# Altium PCB SWS_RIGHT.PcbDoc
Units mm, origin at the board's own origin, x right, y up, seen from the top; angles counter-clockwise.
Board outline 46.26 x 38.25 mm, 2 copper layers (Top Layer, Bottom Layer), stack 1.17 mm thick; 15 components, 20 nets, 80 pads, 90 vias.
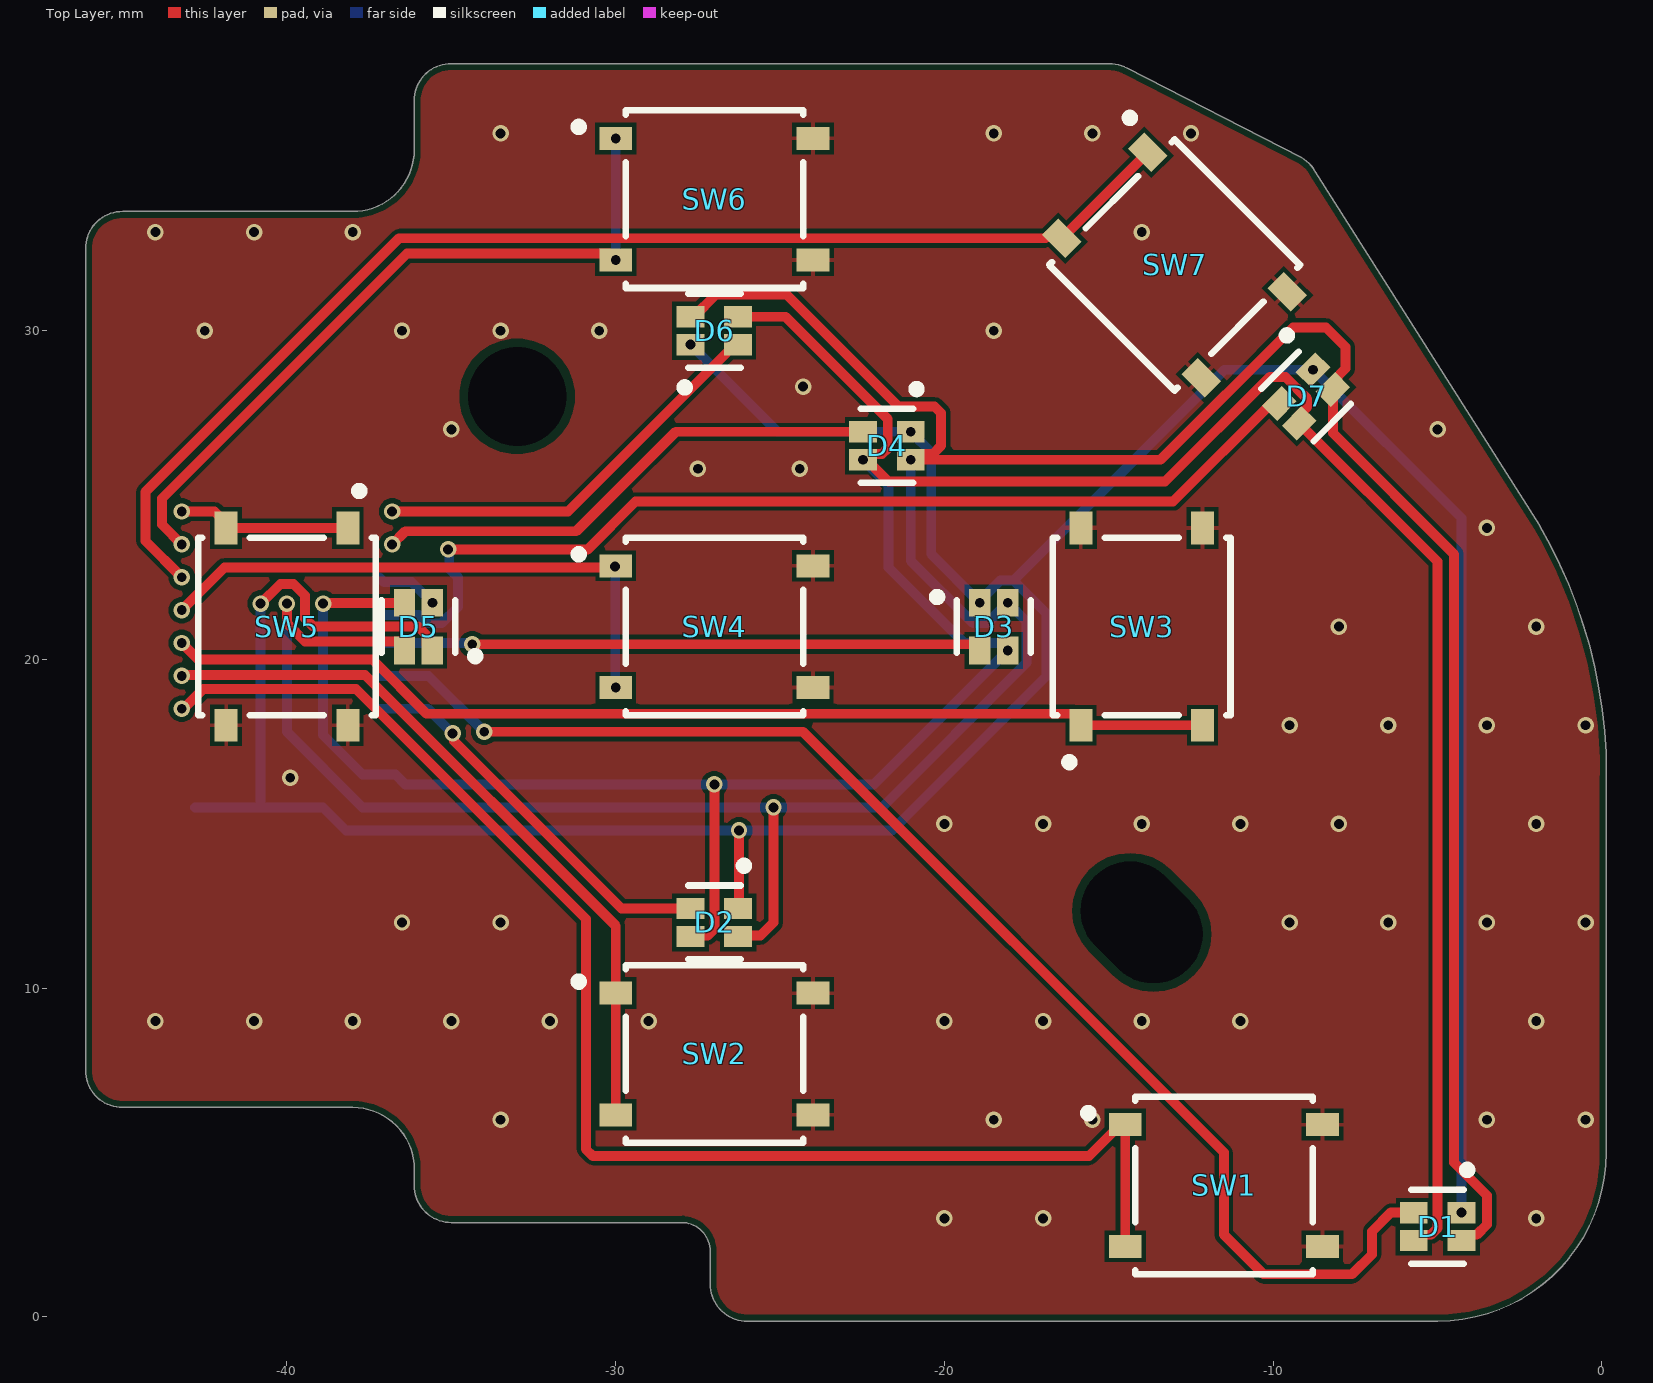
[diagram p0: Top Layer view]
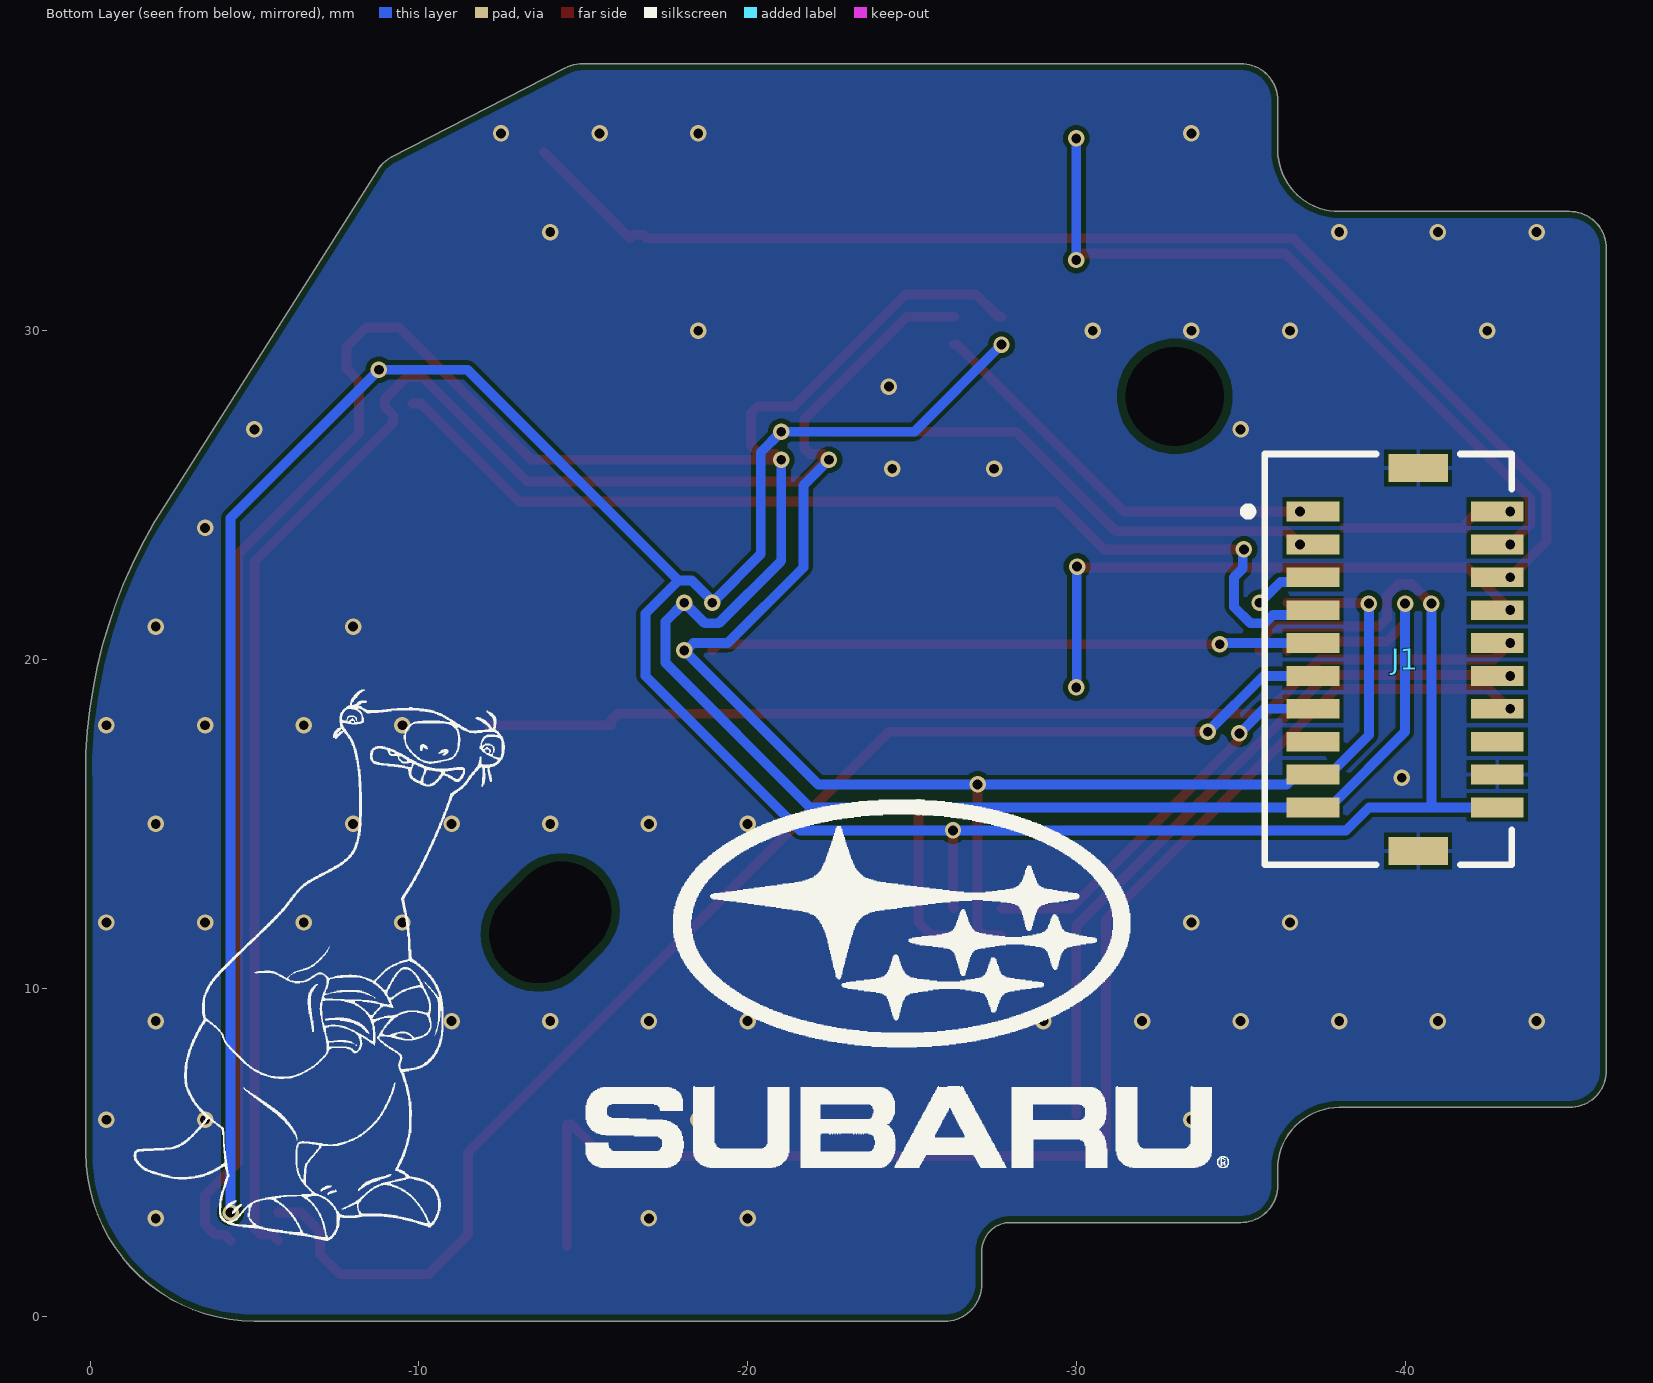
[diagram p1: Bottom Layer view, seen from below]
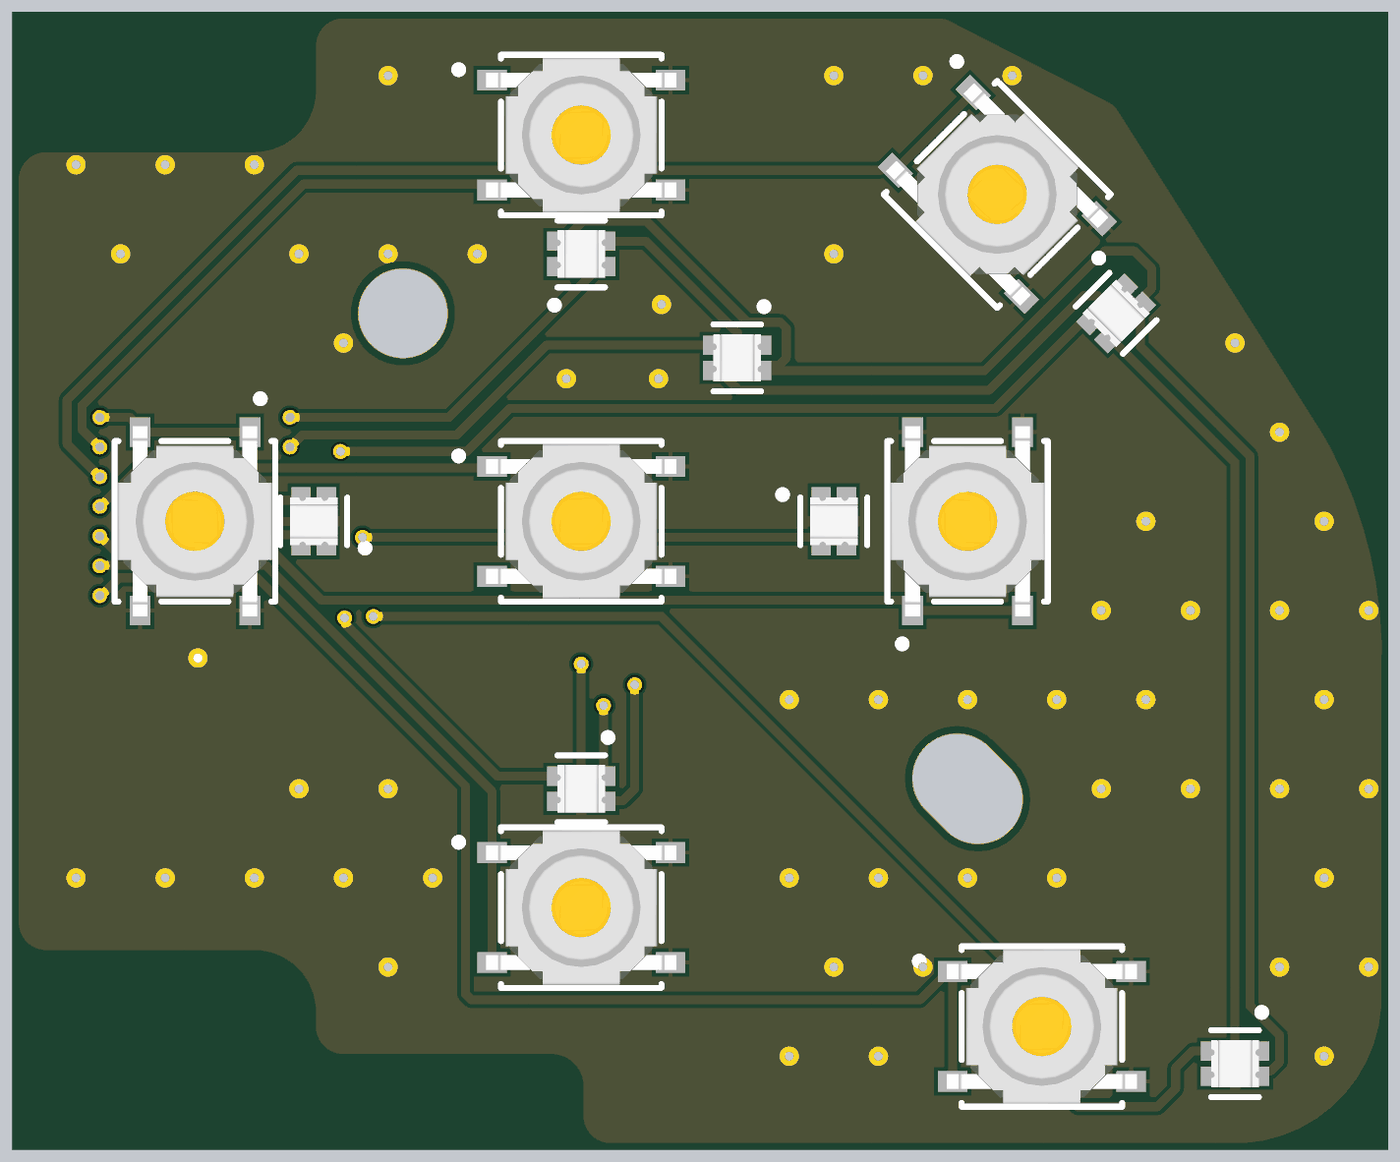
[diagram p2: 3D render of the assembled board from above, using the file's embedded part models]

## Layer stack, top to bottom
Top Solder: solder mask 0.0127, Solder Resist, Dk 3.8
Top Layer: signal copper 0.035
Dielectric: core 1.1, FR-4, Dk 4.5
Bottom Layer: signal copper 0.035
Bottom Solder: solder mask 0.0127, Solder Resist, Dk 3.8

## Board outline
-36.127,4 -36.127,4.5 ccw(c-38,4.5) -37.999,6.373 -38,6.373 -45,6.373 cw(c-45,7.5) -46.127,7.5 -46.127,32.5 cw(c-45,32.5) -45,33.627 -38,33.627 ccw(c-38,35.5) -36.127,35.5 -36.127,37 cw(c-35,37) -35,38.127 -15,38.127 cw(c-15,37) -14.439,37.978 -9.149,35.272 -9.143,35.269 cw(c-9.707,34.293) -8.732,34.859 -1.893,24.068 -1.89,24.064 cw(c-14.99,16.5) 0.137,16.5 0.127,16.451 0.127,5 cw(c-5,5) -4.999,-0.127 -5,-0.127 -26,-0.127 cw(c-26,1) -27.127,1 -27.127,2 ccw(c-28,2) -27.999,2.873 -28,2.873 -35,2.873 cw(c-35,4)

## Design rules (kind name [scope] priority, off if disabled: settings)
BoardOutlineClearance [All] p1: gap=0.2 ignorepadtopadclearanceinfootprint=FALSE
Clearance [All] p1: gap=0.127 ignorepadtopadclearanceinfootprint=FALSE except(0.25: Arc-Hole Track-Hole SMDPad-Hole THPad-Hole Via-Hole Fill-Hole Poly-Hole Region-Hole Text-Hole)
ComponentClearance [All] p1: gap=0.127 collisioncheckmode=3 verticalgap=0.127 showdistances=TRUE
DiffPairsRouting [All] p1: maxlimit=0.254 minlimit=0.127 mostfreqgap=0.127 toplayer_minwidth=0.127 toplayer_maxwidth=25.4 toplayer_prefwidth=0.127 bottomlayer_minwidth=0.127 bottomlayer_maxwidth=25.4 bottomlayer_prefwidth=0.127 maxuncoupledlength=12.7
Height [All] p1: minheight=0 maxheight=1816.048 prefheight=12.7
HoleSize [All] p1: absolutevalues=TRUE maxlimit=6.3 minlimit=0.3 maxpercent=80.000 minpercent=20.000
HoleToHoleClearance [All] p1: gap=0.25 allowstackedmicrovias=FALSE
MinimumAnnularRing [All] p1: minimumring=0.076
MinimumSolderMaskSliver [All] p1: minsoldermaskwidth=0
PlaneClearance [All] p1: clearance=0.127
PlaneConnect PlaneConnectPowerPads [InPadClass('PowerPads')] p1: planeconnectstyle=Direct reliefexpansion=0.508 reliefentries=4 reliefconductorwidth=0.254 reliefairgap=0.254
PlaneConnect [All] p2: pad.planeconnectstyle=Relief pad.reliefexpansion=0.3 pad.reliefentries=4 pad.reliefconductorwidth=0.127 pad.reliefairgap=0.127 via.planeconnectstyle=Direct via.reliefexpansion=0.3 via.reliefentries=4 via.reliefconductorwidth=0.127 via.reliefairgap=0.127
PolygonConnect PolygonConnectPowerPads [All vs (InPadClass('PowerPads'))] p1: connectstyle=Direct reliefconductorwidth=0.254 reliefentries=4 polygonreliefangle="90 Angle" airgapwidth=0.254
PolygonConnect [All] p2: thpad.connectstyle=Relief thpad.reliefconductorwidth=0.127 thpad.reliefentries=4 thpad.polygonreliefangle="90 Angle" thpad.airgapwidth=0.127 smdpad.connectstyle=Relief smdpad.reliefconductorwidth=0.127 smdpad.reliefentries=4 smdpad.polygonreliefangle="90 Angle" smdpad.airgapwidth=0.127 via.connectstyle=Direct via.reliefconductorwidth=0.127 via.reliefentries=4 via.polygonreliefangle="90 Angle" via.airgapwidth=0.127
RoutingVias [All] p1: holewidth=0.3 width=0.6 viastyle="Through Hole" minholewidth=0.3 minwidth=0.6 maxholewidth=0.6 maxwidth=6.6
SilkToSilkClearance [All] p1: silktosilkclearance=0
SilkToSolderMaskClearance [IsPad] p1: minsilkscreentomaskgap=0.127 clearancetoexposedcopper=TRUE
SolderMaskExpansion [All] p1: expansion=0.075 istentingtop=FALSE
Width [All] p1: maxlimit=25.4 minlimit=0.127 preferedwidth=0.127 minimp=50.000000 maximp=50.000000 favimp=50.000000
20 further rules are at their usual default settings.

## Components (designator, comment, footprint, x,y, rotation, side; value= is the part's Value field where it differs from the comment)
D1 "LTST-C19HE1WT" FP-LTST-C19HE1WT-MFG -5,2.75 r270 top locked
D2 "LTST-C19HE1WT" FP-LTST-C19HE1WT-MFG -27,12 r270 top
D3 "LTST-C19HE1WT" FP-LTST-C19HE1WT-MFG -18.5,21 r0 top locked
D4 "LTST-C19HE1WT" FP-LTST-C19HE1WT-MFG -21.75,26.5 r270 top locked
D5 "LTST-C19HE1WT" FP-LTST-C19HE1WT-MFG -36,21 r180 top locked
D6 "LTST-C19HE1WT" FP-LTST-C19HE1WT-MFG -27,30 r90 top locked
D7 "LTST-C19HE1WT" FP-LTST-C19HE1WT-MFG -9,28 r315 top locked
J1 "501190-2017" FP-501190-2017-MFG -40,20 r270 bottom
SW1 "PTS526SK15SMTR2LFS" FP-PTS526SK15SMTR2LFS-MFG -11.5,4 r0 top locked
SW2 "PTS526SK15SMTR2LFS" FP-PTS526SK15SMTR2LFS-MFG -27,8 r0 top locked
SW3 "PTS526SK15SMTR2LFS" FP-PTS526SK15SMTR2LFS-MFG -14,21 r90 top locked
SW4 "PTS526SK15SMTR2LFS" FP-PTS526SK15SMTR2LFS-MFG -27,21 r0 top locked
SW5 "PTS526SK15SMTR2LFS" FP-PTS526SK15SMTR2LFS-MFG -40,21 r270 top locked
SW6 "PTS526SK15SMTR2LFS" FP-PTS526SK15SMTR2LFS-MFG -27,34 r0 top
SW7 "PTS526SK15SMTR2LFS" FP-PTS526SK15SMTR2LFS-MFG -13,32 r315 top

## Footprints (in the part's own frame and the unit in brackets; to place one, negate y for a bottom-side part, rotate by r counter-clockwise, add the part's x,y. Pads: shape width x height; smd on the part's side, far side on the other; paste and mask are expansions set on the pad)
FP-501190-2017-MFG [mm]
  rect 0.6x1.6 smd paste+0 mask+0: 1(-4.5,-2.8) 2(-4.5,2.8) 3(-3.5,-2.8) 4(-3.5,2.8) 5(-2.5,-2.8) 6(-2.5,2.8) 7(-1.5,-2.8) 8(-1.5,2.8) 9(-0.5,-2.8) 10(-0.5,2.8) 11(0.5,-2.8) 12(0.5,2.8) 13(1.5,-2.8) 14(1.5,2.8) 15(2.5,-2.8) 16(2.5,2.8) 17(3.5,-2.8) 18(3.5,2.8) 19(4.5,-2.8) 20(4.5,2.8)
  rect 0.85x1.8 smd paste+0 mask+0: 21(-5.825,0.4) 22(5.825,0.4)
  silkscreen extent -6.25,-4.9 6.25,3.24, body extent -6.15,-4.07 6.15,3.2, height 5.61
FP-LTST-C19HE1WT-MFG [mm]
  rect 0.65x0.85 smd paste+0 mask+0: 1(-0.425,0.725) 2(0.425,0.725) 3(0.425,-0.725) 4(-0.425,-0.725)
  silkscreen extent -1.85,-0.8 1.12,1.03, body extent -0.95,-1.25 0.95,1.25, height 0.25
FP-PTS526SK15SMTR2LFS-MFG [mm]
  rect 1x0.7 smd paste+0 mask+0: 1(-3,1.85) 2(3,1.85) 3(-3,-1.85) 4(3,-1.85)
  silkscreen extent -4.25,-2.7 2.7,2.7, body extent -3.6,-2.8 3.6,2.8, height 0.25

## Part data
D1 D2 D3 D4 D5 D6 D7: library part CMP-2000-05201-2, "LED RGB DIFFUSED CHIP SMD", Case Code (Imperial)=0606, Case Code (Metric)=1616, Color=Blue, Forward Current=20mA, Forward Voltage=3.35V, Lens Color=White, Max Operating Temperature=80°C, Min Operating Temperature=-20°C, Package Quantity=3000, Reverse Voltage=5V, Case/Package=0606, Depth=1.6mm, Dominant Wavelength=470nm, Height=0.35mm, Lead Free="Lead Free", Length=1.6mm, Lens Style=Diffused, Lens Transparency=Diffused, Luminous Intensity=180mcd, Mount="Surface Mount", Number of Elements=3, Number of LEDs=3, Number of Pins=4, Packaging="Tape and Reel", Radiation Hardening=No, Test Current=20mA, Viewing Angle=130°, Width=1.6mm
J1: library part CMP-04776-000294-1, "CONN HEADER SMD 20POS 1MM", Color=Natural, Contact Resistance=20mR, Current Rating=1A, Max Operating Temperature=85°C, Min Operating Temperature=-40°C, Package Quantity=1100, Voltage Rating=50V, Connector Type="Male Pin", Contact Material=Bronze, Contact Plating=Gold, Contact Type="Male Pin", Depth=7.27mm, Fastening Type=Latch, Gender=Male, Glow Wire Compliant=Non-compliant, Housing Color=Natural, Housing Material=Thermoplastic, Lead Free="Lead Free", Length=12.3mm, Mount="Surface Mount", Number of Circuits=20, Number of Contacts=20, Number of Positions=20, Number of Rows=2, Orientation=Vertical, Packaging="Tape and Reel", Pitch=1mm, Radiation Hardening=No, Row Spacing=0.105inch, Series=Pico-Clasp, Termination=Solder, Voltage Rating (DC)=50V
SW1 SW2 SW3 SW4 SW5 SW6 SW7: library part CMP-10040-000013-1, "TACT 5.2 X 5.2, 1.5 MM H, 260GF,", Contact Current Rating=50mA, Contact Resistance=100mΩ, Manufacturer=C&K, Operating Force=250gf, Temperature="-20°C to +70°C", Temperature Range High=+70°C, Temperature Range Low=-20°C, Voltage Rating Dc=12V, Automotive=No, Category=Switch, ComponentLink2Description=Datasheet, ComponentLink2URL=https://www.ckswitches.com/media/2780/pts526.pdf, Device Class L1=Electromechanical, Device Class L2=Switches, Device Class L3="Tactile Switches", Digikey Description="TACT 5.2 X 5.2, 1.5 MM H, 260GF,", Electromechanical Life=200000Cycles, Height=1.65mm, Lead Free=Yes, Manufacturer Part Number=PTS526SK15SMTR2LFS, Octopart=https://octopart.com/pts526+sk15+smtr2+lfs-c%26k+components-100617999, Package=PTS526SK15SMTR2LFS, RoHS=TRUE, Standoff Height=0mm, Throw Configuration=SPST-NO

## Free pads (board coordinates)
  round 0.5 / inner round 0.5 / far side rrect50% 0.5x0.5 hole 3 slot 4 at 135 deg: 22(-14,12)
  round 0.5 hole 3: 23(-33,28)

## Via types
v1: diameter 0.5, hole 0.3, Top Layer to Bottom Layer, 90 vias

## Nets (pads, with @x,y where several pads share a name; then routed paths per layer and width w, separated by ;. In a path a pad name is that pad's centre, name@x,y a point inside that pad or via, vN(x,y) a via of type N, cw(c..) or ccw(c..) an arc to the next point about the centre after c; other vN are vias at no path point)
GND: J1.18 J1.21 J1.22 SW1.2 SW1.4 SW2.2 SW2.4 SW3.2 SW3.4 SW4.2 SW4.4 SW5.2 SW5.4 SW6.2 SW6.4 SW7.2 SW7.4
  other v1: -20,3 -17,3 -2,3 -33.5,6 -18.5,6 -15.5,6 -3.5,6 -0.5,6 -44,9 -41,9 -38,9 -35,9 -32,9 -29,9 -20,9 -17,9 -14,9 -11,9 -2,9 -36.5,12 -33.5,12 -9.5,12 -6.5,12 -3.5,12 -0.5,12 -20,15 -17,15 -14,15 -11,15 -8,15 -2,15 -39.9,16.4 -9.5,18 -6.5,18 -3.5,18 -0.5,18 -8,21 -2,21 -3.5,24 -27.5,25.8 -24.4,25.8 -35,27 -5,27 -24.3,28.3 -42.5,30 -36.5,30 -33.5,30 -30.5,30 -18.5,30 -44,33 -41,33 -38,33 -14,33 -33.5,36 -18.5,36 -15.5,36 -12.5,36
LED_GND_BLU: D1.3 D2.3 D3.3 D4.3 D5.3 D6.3 D7.3 J1.17 | length 94.1
  Top Layer w0.3: v1(-38.9,21.7) -38.888,21.712 -36.438,21.712 D5.3 ; D2.3 -27.7,11.6 -27.2,11.6 -27,11.8 v1(-27,16.2) ; D6.3 -24.833,30.425 -21.727,27.319 -21.727,26.426 -21.903,26.25 -22.3,26.25 v1(-22.475,26.075) -22.375,26.075 -21.708,25.408 -13.292,25.408 -10.105,28.595 -9.628,28.595 -8.964,27.931 -8.964,27.683 -9.212,27.434 D7.3 -5,22.975 -5,2.7 -5.2,2.5 -5.55,2.5 D1.3
  Bottom Layer w0.3: v1(-38.9,21.7) -38.9,17.7 -37.7,16.5 J1.17 -36.7,16.5 -36.4,16.2 v1(-27,16.2) -22.15,16.2 v1(-18.075,20.275) -18.126,20.275 -18.351,20.5 -19.4,20.5 -21.7,22.8 -21.7,25.3 v1(-22.475,26.075)
LED_GND_GRN: D1.2 D2.2 D3.2 D4.2 D5.2 D6.2 D7.2 J1.19 | length 104
  Top Layer w0.3: v1(-40,21.7) -40,21.1 -39.45,20.55 -36.6,20.55 -36.425,20.375 D5.2 ; D6.2 -27.625,30.425 -26.95,31.1 -24.8,31.1 -21.4,27.7 -20.3,27.7 -20.1,27.5 -20.1,26.5 -20.35,26.25 -20.85,26.25 v1(-21.025,26.075) -13.425,26.075 -9.4,30.1 -8.4,30.1 -7.8,29.5 -7.8,28.846 -8.187,28.46 D7.2 -8.187,26.887 -4.5,23.2 -4.5,4.7 -3.5,3.7 -3.5,2.808 -3.808,2.5 -4.1,2.5 D1.2 ; D2.2 -26.25,11.6 -25.6,11.6 -25.2,12 v1(-25.2,15.5)
  Bottom Layer w0.3: v1(-40,21.7) -40,17.8 -37.7,15.5 J1.19 v1(-25.2,15.5) -21.9,15.5 -17.5,19.9 -17.5,21.15 v1(-18.075,21.725) -18.7,21.1 -19.124,21.1 -21.025,23.001 v1(-21.025,26.075)
LED_GND_RED: D1.1 D2.1 D3.1 D4.1 D5.1 D6.1 D7.1 J1.20 | length 101.4
  Top Layer w0.3: v1(-40.8,21.7) -40.798,21.7 -40.198,22.3 -39.8,22.3 -39.45,21.95 -39.45,21.25 -39.2,21 -36.008,21 -35.75,20.742 -35.75,20.45 D5.1 ; D2.1 -26.25,12.45 v1(-26.25,14.8)
  Bottom Layer w0.3: J1.20 -40.8,15.5 ; v1(-40.8,21.7) -40.8,15.5 ; v1(-27.725,29.575) -25.075,26.925 v1(-21.025,26.925) -20.4,26.3 -20.4,23.2 v1(-18.925,21.725) ; v1@-18.925,21.779 -18.304,22.4 -17.9,22.4 ; v1(-4.275,3.175) -4.275,24.3 v1(-8.788,28.813) -11.487,28.813 -17.9,22.4 ; -40.8,15.5 -38.9,15.5 -38.2,14.8 -21.6,14.8 -16.9,19.5 -16.9,21.4 -17.9,22.4
LED_POS_0: D6.4 J1.1 | length 12.6
  Top Layer w0.3: v1(-36.8,24.5) -31.45,24.5 -26.375,29.575 D6.4
LED_POS_1: D4.4 J1.3 | length 15.7
  Top Layer w0.3: v1(-36.8,23.5) -36.4,23.9 -31.2,23.9 -28.175,26.925 D4.4
LED_POS_2: D5.4 J1.5 | length 1.9
  Bottom Layer w0.3: J1.5 -37.057,22.357 -36.207,22.357 v1(-35.575,21.725)
LED_POS_3: D7.4 J1.7 | length 31.8
  Top Layer w0.3: v1(-35.1,23.35) -30.85,23.35 -29.4,24.8 -13.049,24.8 -10.061,27.788 D7.4
  Bottom Layer w0.3: J1.7 -37.05,21.35 -35.978,21.35 -35.728,21.1 -35.3,21.1 -34.8,21.6 -34.8,22.5 -35.062,22.762 -35.062,23.312 v1(-35.1,23.35)
LED_POS_4: D3.4 J1.9 | length 18.4
  Top Layer w0.3: v1(-34.362,20.462) -19.1,20.462 -18.925,20.287 D3.4
  Bottom Layer w0.3: J1.9 -34.4,20.5 v1(-34.362,20.462)
LED_POS_5: D1.4 J1.11 | length 41.7
  Top Layer w0.3: v1(-34,17.8) -24.3,17.8 -11.5,5 -11.5,2.5 -10.3,1.3 -7.6,1.3 -7,1.9 -7,2.6 -6.425,3.175 D1.4
  Bottom Layer w0.3: J1.11 -35.7,19.5 v1(-34,17.8)
LED_POS_6: D2.4 J1.13 | length 12.1
  Top Layer w0.3: v1(-34.962,17.75) -34.923,17.712 -34.923,17.523 -29.825,12.425 D2.4
  Bottom Layer w0.3: J1.13 -35.712,18.5 v1(-34.962,17.75)
LED_POS_7: J1.15
SW_OUT_0: J1.2 SW5.1 SW5.3 | length 5.3
  Top Layer w0.3: v1(-43.2,24.5) -42.2,24.5 -41.85,24.15 SW5.3 SW5.1
SW_OUT_1: J1.4 SW6.1 SW6.3 | length 22.3
  Top Layer w0.3: v1(-43.2,23.5) -43.8,24.1 -43.8,24.9 -36.35,32.35 -30.2,32.35 v1(-30,32.15)
  Bottom Layer w0.3: v1(-30,32.15) v1(-30,35.85)
SW_OUT_2: J1.6 SW7.1 SW7.3 | length 37.9
  Top Layer w0.3: v1(-43.2,22.5) -44.3,23.6 -44.3,25.1 -36.587,32.813 -16.924,32.813 -16.818,32.919 -16.536,32.919 SW7.3 SW7.1
SW_OUT_3: J1.8 SW4.1 SW4.3 | length 17.4
  Top Layer w0.3: v1(-43.2,21.5) -41.9,22.8 -30.05,22.8 v1(-30.025,22.825) SW4.1
  Bottom Layer w0.3: v1(-30.025,22.825) -30.012,22.813 -30.012,19.163 v1(-30,19.15)
SW_OUT_4: J1.10 SW3.1 SW3.3 | length 32.2
  Top Layer w0.3: v1(-43.2,20.5) -42.7,20 -37.4,20 -35.75,18.35 -16.05,18.35 -15.85,18.15 SW3.1 SW3.3
SW_OUT_5: J1.12 SW2.1 SW2.3 | length 22.1
  Top Layer w0.3: v1(-43.2,19.5) -43.173,19.527 -37.627,19.527 -30,11.9 SW2.1 SW2.3
SW_OUT_6: J1.14 SW1.1 SW1.3 | length 43
  Top Layer w0.3: v1(-43.2,18.5) -43.146,18.5 -42.546,19.1 -37.9,19.1 -30.9,12.1 -30.9,5.1 -30.7,4.9 -15.6,4.9 -14.65,5.85 SW1.1 SW1.3
SW_OUT_7: J1.16

## Polygon pours and split planes (outlines as drawn)
GND on Top Layer "GND_L01_P000" (solid, remove dead copper, pour order 0): -36.127,4 -36.127,4.5 ccw(c-38,4.5) -37.999,6.373 -38,6.373 -45,6.373 cw(c-45,7.5) -46.127,7.5 -46.127,32.5 cw(c-45,32.5) -45,33.627 -38,33.627 ccw(c-38,35.5) -36.127,35.5 -36.127,37 cw(c-35,37) -35,38.127 -15,38.127 cw(c-15,37) -14.439,37.978 -9.149,35.272 -9.143,35.269 cw(c-9.707,34.293) -8.732,34.859 -1.893,24.068 -1.89,24.064 cw(c-14.99,16.5) 0.137,16.5 0.127,16.451 0.127,5 cw(c-5,5) -4.999,-0.127 -5,-0.127 -26,-0.127 cw(c-26,1) -27.127,1 -27.127,2 ccw(c-28,2) -27.999,2.873 -28,2.873 -35,2.873 cw(c-35,4)
GND on Bottom Layer "GND_L02_P001" (solid, remove dead copper, pour order 1): -36.127,4 -36.127,4.5 ccw(c-38,4.5) -37.999,6.373 -38,6.373 -45,6.373 cw(c-45,7.5) -46.127,7.5 -46.127,32.5 cw(c-45,32.5) -45,33.627 -38,33.627 ccw(c-38,35.5) -36.127,35.5 -36.127,37 cw(c-35,37) -35,38.127 -15,38.127 cw(c-15,37) -14.439,37.978 -9.149,35.272 -9.143,35.269 cw(c-9.707,34.293) -8.732,34.859 -1.893,24.068 -1.89,24.064 cw(c-14.99,16.5) 0.137,16.5 0.127,16.451 0.127,5 cw(c-5,5) -4.999,-0.127 -5,-0.127 -26,-0.127 cw(c-26,1) -27.127,1 -27.127,2 ccw(c-28,2) -27.999,2.873 -28,2.873 -35,2.873 cw(c-35,4)

## Silkscreen, mask and mechanical layers (free items; w line width, h text height)
Bottom Overlay:
  drawing of 29 lines, arcs and shapes, not listed
Mechanical 1:
  lines w0.254: -36,35 -36,37 cw(c-35,37) -35,38 -15,38 cw(c-15,37) -14.5,37.866 -9.207,35.159 cw(c-9.707,34.293) -8.841,34.793 -2,24 cw(c-14.99,16.5) 0.01,16.5 ; -36,35.5 cw(c-38,35.5) -38,33.5 -45,33.5 ccw(c-45,32.5) -46,32.5 -46,7.5 ccw(c-45,7.5) -45,6.5 -38,6.5 cw(c-38,4.5) -36,4.5 -36,4 ccw(c-35,4) -35,3 -28,3 cw(c-28,2) -27,2 -27,1 ccw(c-26,1) -26,0 -5,0 ccw(c-5,5) 0,5 0,16.5